# Altium PCB DS133-1.0-B电导率传感器.PcbDoc
Units mil, origin at the board's own origin, x right, y up, seen from the top; angles counter-clockwise.
Board outline 1614.17 x 2519.69 mil, 2 copper layers (Top Layer, Bottom Layer); 78 components, 67 nets, 269 pads, 114 vias.
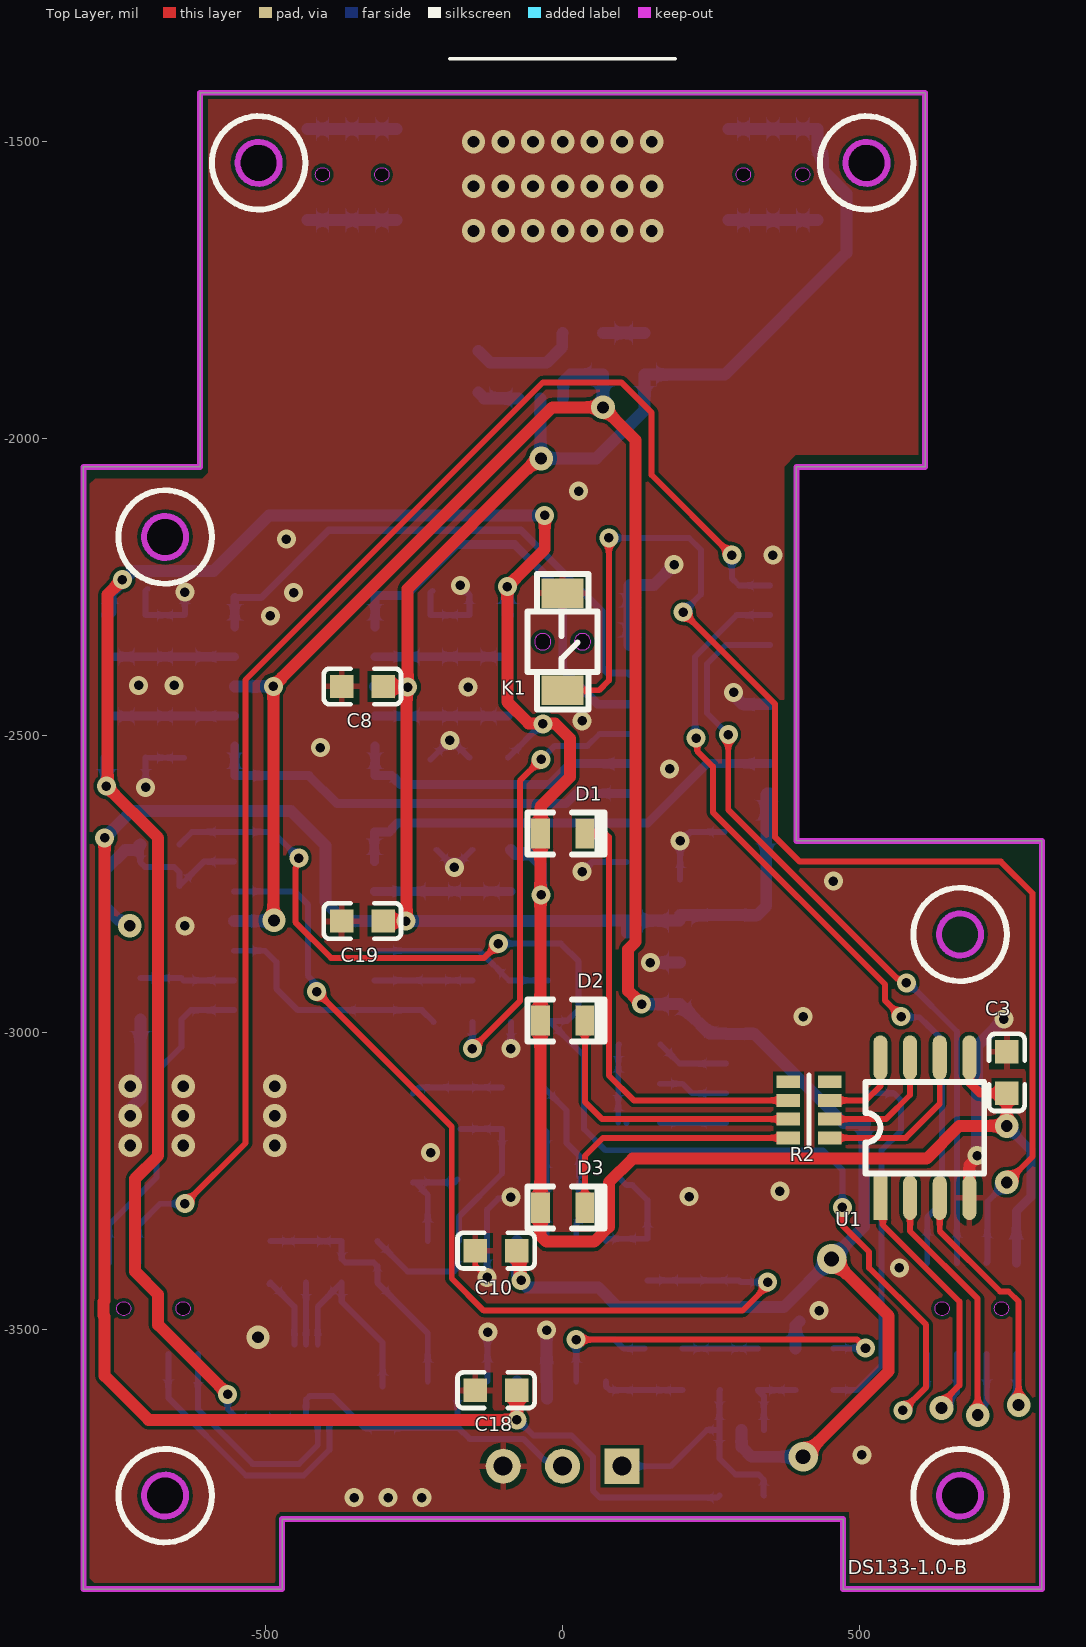
[diagram p0: Top Layer view]
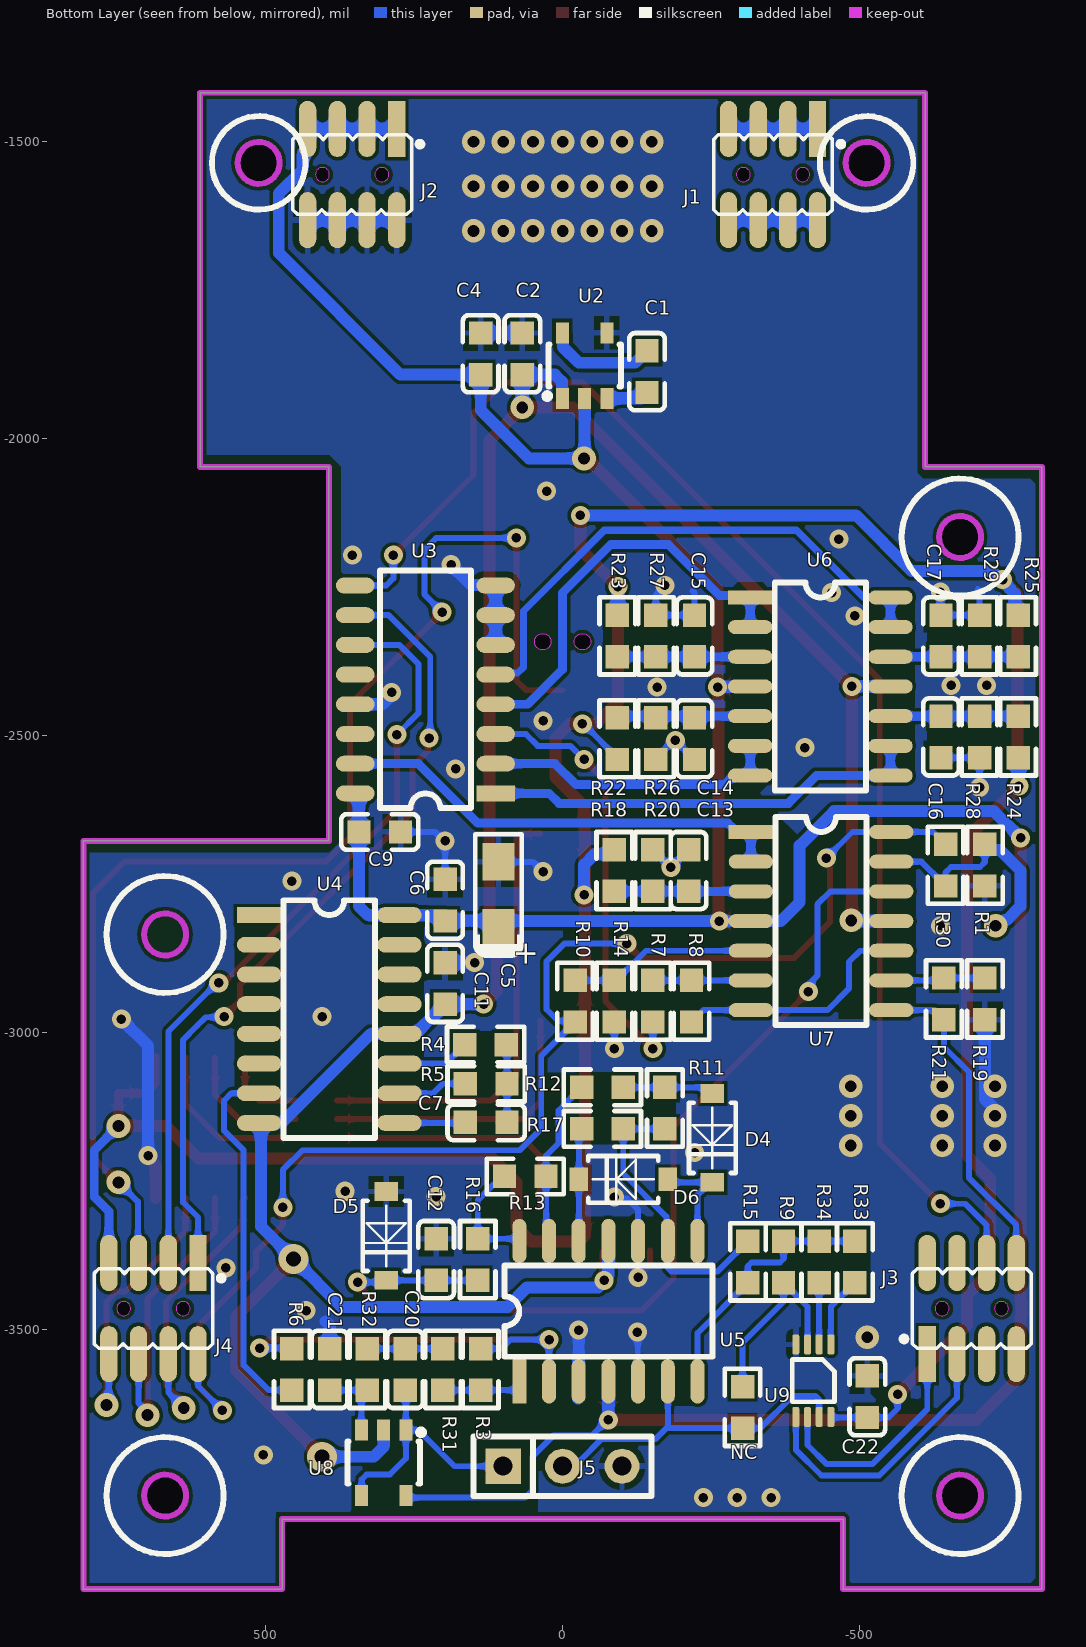
[diagram p1: Bottom Layer view, seen from below]
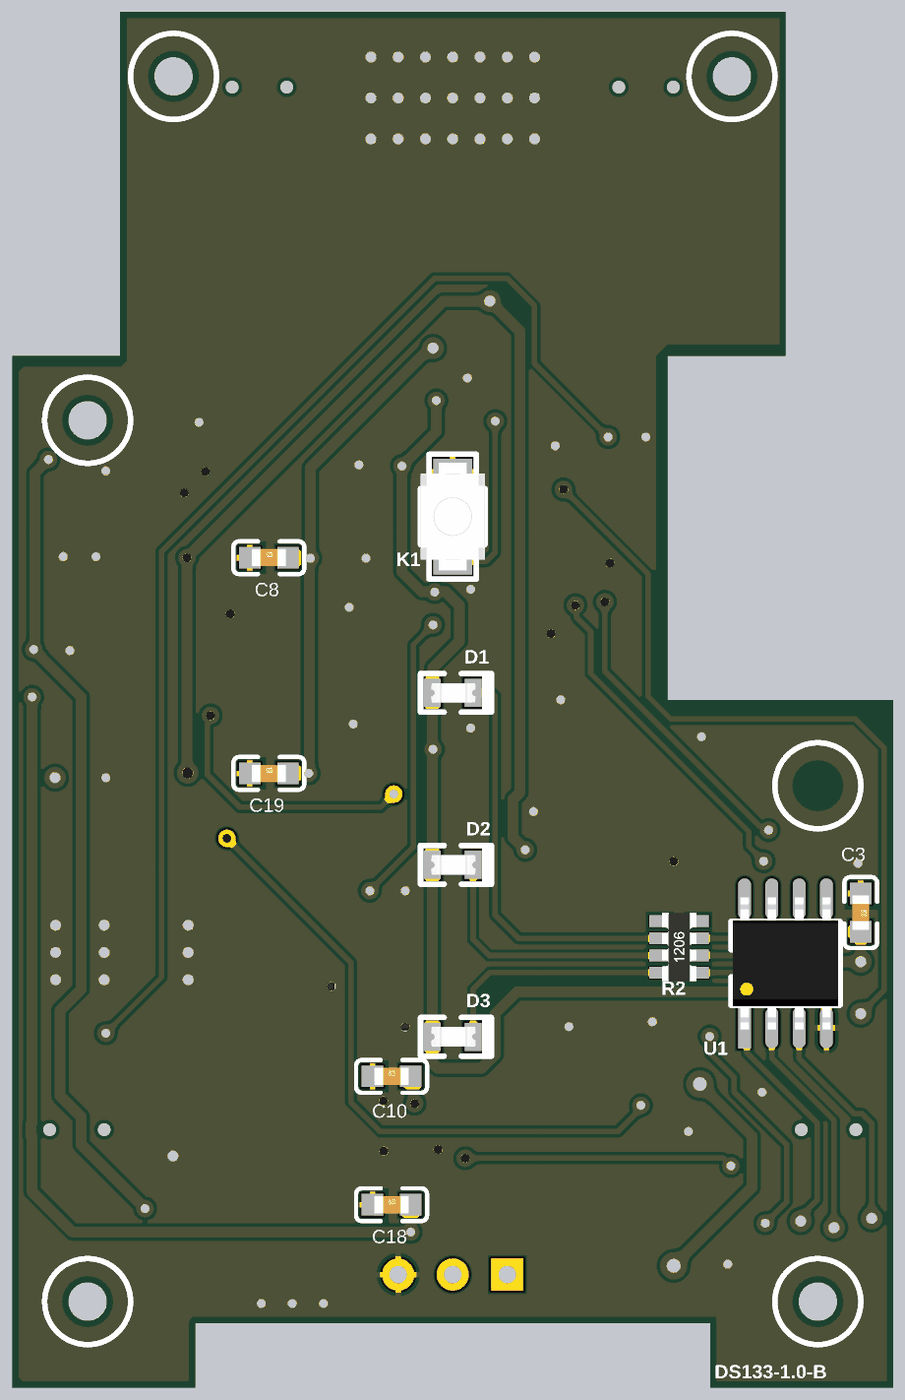
[diagram p2: 3D render of the assembled board from above, using the file's embedded part models]
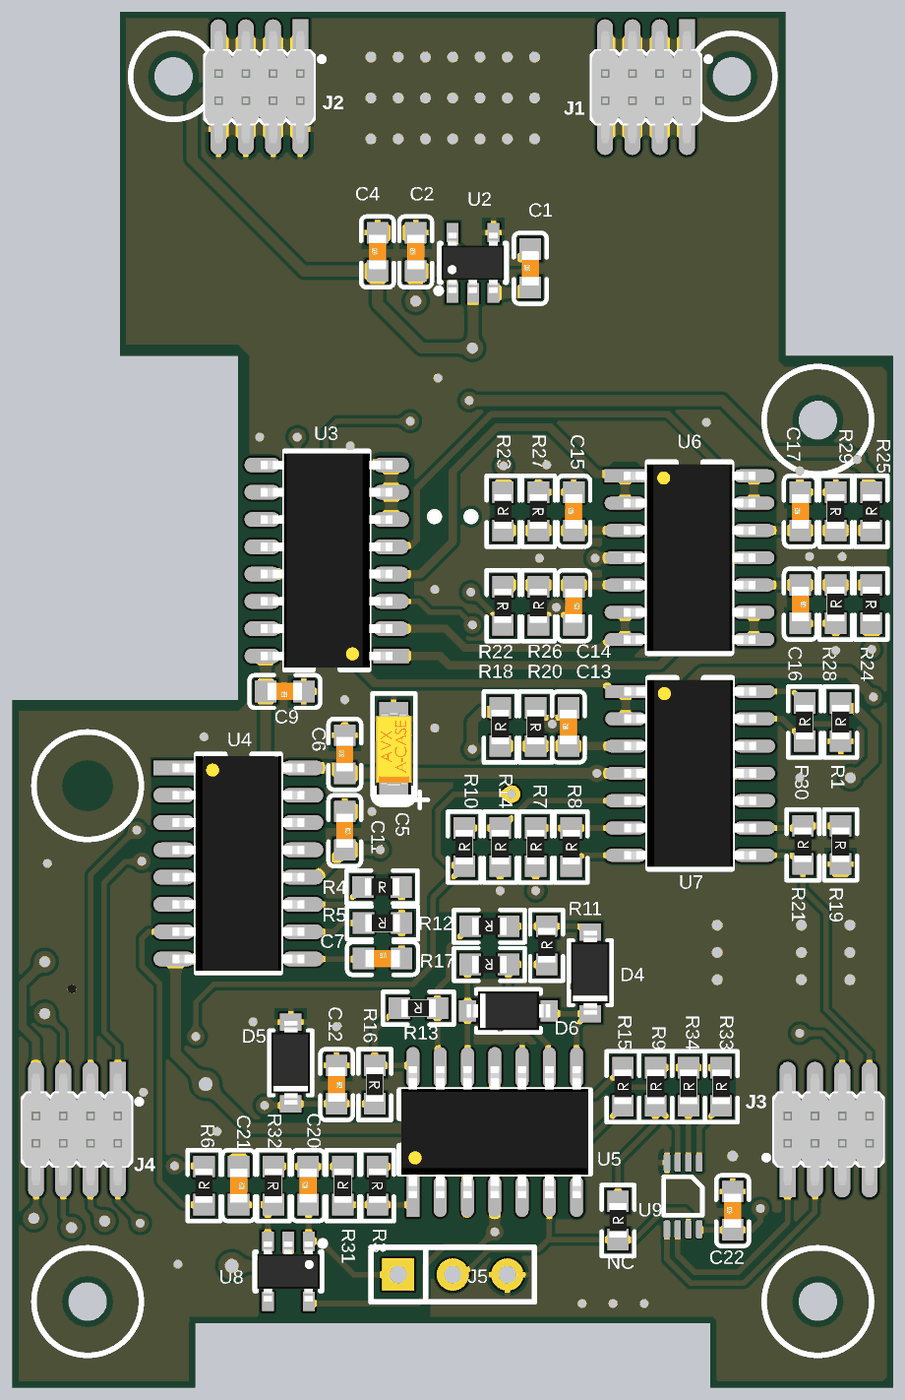
[diagram p3: 3D render of the assembled board from below, using the file's embedded part models]

## Layer stack, top to bottom
Top Solder: solder mask 0.4, Solder Resist, Dk 3.5
Top Layer: signal copper 1.4
Dielectric 1: dielectric 12.6, FR-4, Dk 4.8
Bottom Layer: signal copper 1.4
Bottom Solder: solder mask 0.4, Solder Resist, Dk 3.5

## Board outline
-807.09,-3937.01 -807.09,-2047.24 -610.24,-2047.24 -610.24,-1417.32 610.24,-1417.32 610.24,-2047.24 393.7,-2047.24 393.7,-2677.17 807.09,-2677.17 807.09,-3937.01 472.44,-3937.01 472.44,-3818.9 -472.44,-3818.9 -472.44,-3937.01
cut-out: 511.81,-1570.87 cw(c511.81,-1535.43) 476.38,-1535.43 cw(c511.81,-1535.43) 511.81,-1500 cw(c511.81,-1535.43) 547.24,-1535.43 cw(c511.81,-1535.43)
cut-out: -511.81,-1570.87 cw(c-511.81,-1535.43) -547.24,-1535.43 cw(c-511.81,-1535.43) -511.81,-1500 cw(c-511.81,-1535.43) -476.38,-1535.43 cw(c-511.81,-1535.43)
cut-out: -669.29,-2200.79 cw(c-669.29,-2165.35) -704.72,-2165.35 cw(c-669.29,-2165.35) -669.29,-2129.92 cw(c-669.29,-2165.35) -633.86,-2165.35 cw(c-669.29,-2165.35)
cut-out: -704.72,-3779.53 ccw(c-669.29,-3779.53) -669.29,-3814.96 ccw(c-669.29,-3779.53) -633.86,-3779.53 ccw(c-669.29,-3779.53) -669.29,-3744.09 ccw(c-669.29,-3779.53)
cut-out: 633.86,-3779.53 ccw(c669.29,-3779.53) 669.29,-3814.96 ccw(c669.29,-3779.53) 704.72,-3779.53 ccw(c669.29,-3779.53) 669.29,-3744.09 ccw(c669.29,-3779.53)

## Design rules (kind name [scope] priority, off if disabled: settings)
Clearance [All] p1: gap=6 ignorepadtopadclearanceinfootprint=TRUE
PolygonConnect [All] p1: thpad.connectstyle=Relief thpad.reliefconductorwidth=10 thpad.reliefentries=4 thpad.polygonreliefangle="90 Angle" thpad.airgapwidth=10 smdpad.connectstyle=Relief smdpad.reliefconductorwidth=10 smdpad.reliefentries=4 smdpad.polygonreliefangle="90 Angle" smdpad.airgapwidth=10 via.connectstyle=Direct via.reliefconductorwidth=10 via.reliefentries=4 via.polygonreliefangle="90 Angle" via.airgapwidth=10
RoutingVias [All] p1: holewidth=16 width=32 viastyle="Through Hole" minholewidth=16 minwidth=32 maxholewidth=28 maxwidth=50
SolderMaskExpansion [All] p1: expansion=4 istentingtop=FALSE
Width [All] p1: maxlimit=20 minlimit=10 preferedwidth=10
30 further rules are at their usual default settings.

## Classes and differential pairs
net class R33_Nets: NetR9_2 NetR33_1
net class NC_Nets: NetJ5_2 NetNC_2
net class U9_Nets: GND IN1 IN2 NetJ5_2 NetNC_2 NetR33_1 NetR34_1 VCC_3V3_MCU
net class R34_Nets: NetR9_2 NetR34_1
net class R9_Nets: NetNC_2 NetR9_2
net class C22_Nets: GND VCC_3V3_MCU
net class U8_Nets: NetC21_2 SIN VCC_5V VCC_-5V
net class R32_Nets: NetC20_2 NetC21_2
net class R31_Nets: NetC20_2 NetR3_2
net class C21_Nets: GND NetC21_2
net class C20_Nets: NetC20_2 SIN
net class R30_Nets: ADC1 NetR1_2
net class R1_Nets: GND NetR1_2
net class C19_Nets: GND VCC_5V
net class C18_Nets: GND VCC_5V
net class U6_Nets: NetC14_1 NetC15_1 NetC16_1 NetC17_1 VCC_5V VCC_-5V Vref_1V43 Vref_1V98 Vref_V3 Vref_V89
net class U7_Nets: ADC0 ADC1 NetC12_2 NetC13_1 NetR1_2 NetR7_2 NetR8_1 NetR10_2 NetR19_1 VCC_5V VCC_-5V Vref_2V53
net class U5_Nets: GND NetD4_2 NetD6_2 NetJ5_2 NetR3_1 NetR3_2 NetR9_2 NetR11_1 NetR12_2 NetR13_2 VCC_5V VCC_-5V
net class U4_Nets: NetC7_1 NetR4_1 NetR5_2 NetR6_1 NetU4_1 NetU4_2 NetU4_3 NetU4_4 NetU4_5 NetU4_6 NetU4_13 NetU4_14 NetU4_15 VCC_5V VCC_-5V
net class U3_Nets: DAC_OUT GND I2C1_SCL I2C1_SDA NetU3_2 NetU3_4 NetU3_6 NetU3_9 NetU3_10 NetU3_11 VCC_5V Vref Vref_1V43 Vref_1V98 Vref_2V53 Vref_V3 Vref_V89
net class U2_Nets: GND NetC1_1 NetC1_2 VCC_5V VCC_-5V
net class U1_Nets: Dis_blue_EN Dis_green_EN Dis_red_EN GND NetR2_1 NetR2_2 NetR2_3 VCC_3V3_MCU
net class R29_Nets: GND NetC17_1
net class R28_Nets: GND NetC16_1
net class R27_Nets: GND NetC15_1
net class R26_Nets: GND NetC14_1
net class R25_Nets: NetC17_1 VCC_3V3_MCU
net class R24_Nets: NetC16_1 VCC_3V3_MCU
net class R23_Nets: NetC15_1 VCC_3V3_MCU
net class R22_Nets: NetC14_1 VCC_3V3_MCU
net class R21_Nets: ADC0 NetR19_1
net class R20_Nets: GND NetC13_1
net class R19_Nets: GND NetR19_1
net class R18_Nets: NetC13_1 VCC_3V3_MCU
net class R17_Nets: NetD6_2 NetR11_1
net class R16_Nets: NetC12_2 NetR13_2
net class R15_Nets: NetR9_2 NetR11_1
net class R14_Nets: GND NetR10_2
net class R13_Nets: NetR12_2 NetR13_2
net class R12_Nets: NetD4_1 NetR12_2
net class R11_Nets: NetD4_1 NetR11_1
net class R10_Nets: ADC1 NetR10_2
net class R8_Nets: NetR7_2 NetR8_1
net class R7_Nets: NetR7_2 Vref
net class R6_Nets: NetR3_1 NetR6_1
net class R5_Nets: NetC7_2 NetR5_2
net class R4_Nets: NetC7_2 NetR4_1
net class R3_Nets: NetR3_1 NetR3_2
net class R2_Nets: LED_blue LED_green LED_red NetR2_1 NetR2_2 NetR2_3
net class K1_Nets: GND KEY_HOME
net class J5_Nets: GND NetJ5_2 SIN
net class J4_Nets: ADC1 Dis_blue_EN Dis_green_EN Dis_red_EN I2C1_SCL I2C1_SDA KEY_HOME VCC_3V3_MCU
net class J3_Nets: ADC0 DAC_OUT IN1 IN2 SPI2_CS SPI2_SCK USART2_RXD USART2_TXD
net class J2_Nets: GND VCC_5V
net class J1_Nets: VBUS VSS
net class D6_Nets: NetD4_2 NetD6_2
net class D5_Nets: GND NetC12_2
net class D4_Nets: NetD4_1 NetD4_2
net class D3_Nets: LED_green VCC_3V3_MCU
net class D2_Nets: LED_red VCC_3V3_MCU
net class D1_Nets: LED_blue VCC_3V3_MCU
net class C17_Nets: GND NetC17_1
net class C16_Nets: GND NetC16_1
net class C15_Nets: GND NetC15_1
net class C14_Nets: GND NetC14_1
net class C13_Nets: GND NetC13_1
net class C12_Nets: GND NetC12_2
net class C11_Nets: GND VCC_-5V
net class C10_Nets: GND VCC_-5V
net class C9_Nets: GND VCC_5V
net class C8_Nets: GND VCC_5V
net class C7_Nets: NetC7_1 NetC7_2
net class C6_Nets: GND VCC_5V
net class C5_Nets: GND VCC_5V
net class C4_Nets: GND VCC_5V
net class C3_Nets: GND VCC_3V3_MCU
net class C2_Nets: GND VCC_-5V
net class C1_Nets: NetC1_1 NetC1_2

## Components (designator, comment, footprint, x,y, rotation, side; value= is the part's Value field where it differs from the comment)
C1 "SMDCAP00016" 0603CAP -142.09,-1887.01 r90 bottom value=3.3uF
C2 "SMDCAP00016" 0603CAP 67.91,-1856.89 r90 bottom value=3.3uF
C3 "" 0603CAP 747.91,-3066.97 r270 top value=100nF
C4 "SMDCAP00016" 0603CAP 137.91,-1856.89 r90 bottom value=3.3uF
C5 "AVX_10uF/16V ±10％(C106)" AVX_3216-18(1206)_SMD 107.91,-2768.01 r90 bottom value=10uF
C6 "SMDCAP00013" 0603CAP 197.91,-2777.01 r90 bottom value=100nF
C7 "SMDCAP00002" 0603CAP 128.68,-3151.01 r180 bottom value=20pF
C8 "" 0603CAP -337.13,-2417.01 r0 top value=100nF
C9 "" 0603CAP 307.87,-2662.01 r0 bottom value=100nF
C10 "" 0603CAP -112.13,-3367.01 r0 top value=100nF
C11 "" 0603CAP 197.91,-2916.97 r270 bottom value=100nF
C12 "" 0603CAP 212.91,-3382.01 r270 bottom value=100nF
C13 "" 0603CAP -212.09,-2727.01 r90 bottom value=100nF
C14 "" 0603CAP -222.09,-2505.01 r270 bottom value=100nF
C15 "" 0603CAP -222.09,-2332.01 r90 bottom value=100nF
C16 "" 0603CAP -637.09,-2502.01 r270 bottom value=100nF
C17 "" 0603CAP -637.09,-2332.01 r90 bottom value=100nF
C18 "" 0603CAP -112.13,-3602.01 r0 top value=100nF
C19 "" 0603CAP -337.13,-2812.01 r0 top value=100nF
C20 "MLCC 2.2nF 50V ±1％ 0603" 0603CAP 265.15,-3567.01 r90 bottom value=2.2nF±1%
C21 "MLCC 2.2nF 50V ±1％ 0603" 0603CAP 392.38,-3567.01 r270 bottom value=2.2nF±1%
C22 "" 0603CAP -513,-3613 r90 bottom value=100nF
D1 "SMDLED00010" LED_0805 0,-2664.57 r0 top locked value=BLUE
D2 "SMDLED00003" LED_0805 0,-2979.53 r0 top locked value=RED
D3 "Chip 翠绿LED 0805" LED_0805 0,-3294.49 r0 top locked value=GREEN
D4 "BAT54W" SOD-123 -252.09,-3177.2 r270 bottom
D5 "BAT54W" SOD-123 297,-3342.2 r270 bottom
D6 "BAT54W" SOD-123 -102.09,-3247.01 r0 bottom
J1 "X1321WVS-2x04J-C40D53" X1321WVS-2X04J-C40D53 -354.33,-1555.12 r0 bottom locked value=2*4P
J2 "X1321WVS-2x04J-C40D53" X1321WVS-2X04J-C40D53 354.33,-1555.12 r0 bottom locked value=2*4P
J3 "X1321WVS-2x04J-C40D53" X1321WVS-2X04J-C40D53 -688.98,-3464.57 r180 bottom locked value=2*4P
J4 "X1321WVS-2x04J-C40D53" X1321WVS-2X04J-C40D53 688.98,-3464.57 r0 bottom locked value=2*4P
J5 "SL000000042" SIP3 100,-3730 r180 bottom value=电导率探头
K1 "TS-1185-B-A-A-A" KEY_TS-1185-x-A-A-A 0,-2341.73 r270 top locked
NC "Chip 0R 1/16W ±1％ 0603" 0603RES -303,-3631 r90 bottom value=0R
R1 "Chip 10K 1/10W ±0.1％ 0603" 0603RES -711,-2718 r90 bottom value="10K ±0.1%"
R2 "SMDRES05003" 0603RES_Pack4 415,-3129.8 r180 top locked value=510R
R3 "Chip 2K 1/10W ±0.1％ 0603" 0603RES 137.91,-3567.01 r270 bottom value="2K ±0.1%"
R4 "Chip 100K 1/10W ±0.1％ 0603" 0603RES 129.73,-3020 r180 bottom value="100K ±0.1%"
R5 "Chip 10K 1/10W ±0.1％ 0603" 0603RES 128.68,-3086.01 r0 bottom value="10K ±0.1%"
R6 "Chip 20K 1/10W ±0.1％ 0603" 0603RES 456,-3567.01 r90 bottom value="20K ±0.1%"
R7 "SMDRES00071" 0603RES -152.09,-2947.01 r90 bottom value=100K
R8 "SMDRES00071" 0603RES -217.09,-2947.01 r90 bottom value=100K
R9 "Chip 820R 1/10W ±0.1％ 0603" 0603RES -372,-3386 r90 bottom value="820R ±0.1%"
R10 "SMDRES00071" 0603RES -21.02,-2947.01 r90 bottom value=100K
R11 "SMDRES00047" 0603RES -172.09,-3127.01 r90 bottom value=4.7K
R12 "SMDRES00047" 0603RES -67.09,-3092.01 r0 bottom value=4.7K
R13 "SMDRES00047" 0603RES 62.91,-3242.01 r0 bottom value=4.7K
R14 "SMDRES00071" 0603RES -87.09,-2947.01 r90 bottom value=100K
R15 "SMDRES00047" 0603RES -312,-3386 r90 bottom value=4.7K
R16 "Chip 10K 1/16W ±1％ 0603" 0603RES 142.91,-3382.01 r270 bottom value=10K
R17 "SMDRES00047" 0603RES -67.09,-3162.01 r0 bottom value=4.7K
R18 "Chip 300R 1/10W ±0.1％ 0603" 0603RES -87.09,-2726.97 r90 bottom value="300R ±0.1%"
R19 "Chip 5K 1/10W ±0.1％ 0603" 0603RES -711,-2943 r270 bottom value="5K ±0.1%"
R20 "Chip 1K 1/10W ±0.1％ 0603" 0603RES -152.09,-2726.97 r270 bottom value="1K ±0.1%"
R21 "Chip 20K 1/10W ±0.1％ 0603" 0603RES -642,-2943 r90 bottom value="20K ±0.1%"
R22 "Chip 2.7K 1/10W ±0.1％ 0603" 0603RES -92.09,-2505.01 r270 bottom value="2.7K ±0.1%"
R23 "Chip 10K 1/10W ±0.1％ 0603" 0603RES -92.09,-2332.01 r90 bottom value="10K ±0.1%"
R24 "Chip 1.3K 1/10W ±0.1％ 0603" 0603RES -767.09,-2502.01 r270 bottom value="1.3K ±0.1%"
R25 "Chip 665R 1/10W ±0.1％ 0603" 0603RES -767.09,-2332.01 r90 bottom value="665R ±0.1%"
R26 "Chip 1K 1/10W ±0.1％ 0603" 0603RES -157.09,-2505.01 r90 bottom value="1K ±0.1%"
R27 "Chip 1K 1/10W ±0.1％ 0603" 0603RES -157.09,-2332.01 r270 bottom value="1K ±0.1%"
R28 "Chip 1K 1/10W ±0.1％ 0603" 0603RES -702.09,-2502.01 r90 bottom value="1K ±0.1%"
R29 "Chip 1K 1/10W ±0.1％ 0603" 0603RES -702.09,-2332.01 r270 bottom value="1K ±0.1%"
R30 "Chip 10K 1/10W ±0.1％ 0603" 0603RES -645,-2718 r90 bottom value="10K ±0.1%"
R31 "Chip 2.7K 1/10W ±0.1％ 0603" 0603RES 201.53,-3567.01 r90 bottom value="2.7K ±0.1%"
R32 "Chip 2.7K 1/10W ±0.1％ 0603" 0603RES 328.77,-3567.01 r270 bottom value="2.7K ±0.1%"
R33 "SMDRES00096" 0603RES -492,-3386 r90 bottom value="82K ±0.1%"
R34 "Chip 8.2k 1/10W ±0.1％ 0603" 0603RES -432.31,-3386 r90 bottom value="8.2K ±0.1%"
U1 "SMDIC000018" SO-8 610,-3160 r90 top locked value=ULN2001
U2 "SGM3206" SOT23-5 -37.09,-1876.89 r180 bottom value=丝印SL7NL
U3 "XL14051BDR" SO-16#1 112.91,-2597.01 r0 bottom
U4 "CD4060BM" SO-16#2 511.02,-2802.01 r180 bottom
U5 "TL074" SO-14 72.91,-3587.01 r90 bottom
U6 "TL074" SO-14 -315.87,-2267.01 r180 bottom
U7 "TL074" SO-14 -317.09,-2662.01 r180 bottom
U8 "OPA192IDBVR / SOT-23-5" SOT23-5 301.4,-3724.12 r0 bottom
U9 "TS5A3359DCUR" VSSOP-8 -422.16,-3586.02 r270 bottom

## Footprints (in the part's own frame and the unit in brackets; to place one, negate y for a bottom-side part, rotate by r counter-clockwise, add the part's x,y. Pads: shape width x height; smd on the part's side, far side on the other; paste and mask are expansions set on the pad)
0603CAP [mm]
  rect 1x1 smd: 1(-0.889,0) 2(0.89,0)
  silkscreen extent -1.65,-0.76 1.65,0.76, body extent -0.8,-0.4 0.8,0.4, height 0.3
0603RES [mm]
  rect 1x1 smd: 1(-0.889,0) 2(0.889,0)
  silkscreen extent -1.65,-0.76 1.65,0.76, body extent -0.8,-0.41 0.8,0.41, height 0.51
0603RES_Pack4 [mm]
  rect 1x0.55 smd mask+0.05: 1(-0.889,1.2) 2(-0.889,0.4) 3(-0.889,-0.4) 4(-0.889,-1.2) 5(0.889,-1.2) 6(0.889,-0.4) 7(0.889,0.4) 8(0.889,1.2)
  silkscreen extent 0,-1.5 0,1.5, body extent -0.8,-1.6 0.8,1.6, height 0.5
AVX_3216-18(1206)_SMD [mm]
  rect 1.6x1.35 smd: 1(-1.41,0) 2(1.41,0)
  silkscreen extent -2.6,-1 2.6,1, body extent -1.7,-0.84 1.7,0.84, height 1.71
KEY_TS-1185-x-A-A-A [mm]
  rect 1.25x1.8 smd: 1(-2.075,0) 2(2.075,0)
  Keep-Out Layer board cut-out: 0.35,-0.85 0.323,-0.716 0.247,-0.603 0.134,-0.527 0,-0.5 0,-0.5 -0.134,-0.527 -0.247,-0.603 -0.323,-0.716 -0.35,-0.85 -0.35,-0.85 -0.323,-0.984 -0.247,-1.097 -0.134,-1.173 0,-1.2 0,-1.2 0.134,-1.173 0.247,-1.097 0.323,-0.984 0.35,-0.85
  Keep-Out Layer board cut-out: -0.35,0.85 -0.323,0.716 -0.247,0.603 -0.134,0.527 0,0.5 0,0.5 0.134,0.527 0.247,0.603 0.323,0.716 0.35,0.85 0.35,0.85 0.323,0.984 0.247,1.097 0.134,1.173 0,1.2 0,1.2 -0.134,1.173 -0.247,1.097 -0.323,0.984 -0.35,0.85
  silkscreen extent -2.9,-1.5 2.9,1.5, body extent -2.5,-1.5 2.5,1.5, height 2
LED_0805 [mm]
  rect 0.8x1.3 smd: 1(-0.95,0) 2(0.95,0)
  silkscreen extent -1.5,-0.9 1.8,0.9, body extent -1,-0.45 1.06,0.45, height 0.85
SIP3 [mm]
  rect 1.5x1.5 hole 0.813: 1(0,0)
  round 1.5 hole 0.813: 2(2.54,0) 3(5.08,0)
  silkscreen extent -1.27,-1.27 6.35,1.27
SO-8 [mm]
  rect 1.9x0.6 smd: 1(-3,1.905)
  oval 1.9x0.6 smd: 2(-3,0.635) 3(-3,-0.635) 4(-3,-1.905) 5(3,-1.905) 6(3,-0.635) 7(3,0.635) 8(3,1.905)
  silkscreen extent -1.95,-2.54 1.95,2.54, body extent -3.07,-2.44 3.07,2.44, height 1.77
SO-14 [mm]
  rect 1.9x0.6 smd: 1(0,0)
  oval 1.9x0.6 smd: 2(0,-1.27) 3(0,-2.54) 4(0,-3.81) 5(0,-5.08) 6(0,-6.35) 7(0,-7.62) 8(6,-7.62) 9(6,-6.35) 10(6,-5.08) 11(6,-3.81) 12(6,-2.54) 13(6,-1.27) 14(6,0)
  silkscreen extent 1.05,-8.25 4.95,0.63, body extent -0.07,-8.16 6.07,0.54, height 1.77
SO-16#1 [mm]
  rect 1.651x0.68 smd: 1(0,0)
  oval 1.651x0.68 smd: 2(0,-1.27) 3(0,-2.54) 4(0,-3.81) 5(0,-5.08) 6(0,-6.35) 7(0,-7.62) 8(0,-8.89) 9(6,-8.89) 10(6,-7.62) 11(6,-6.35) 12(6,-5.08) 13(6,-3.81) 14(6,-2.54) 15(6,-1.27) 16(6,0)
  silkscreen extent 1.05,-9.53 4.95,0.64, body extent -0.07,-9.43 6.07,0.54, height 1.77
SO-16#2 [mm]
  rect 1.9x0.68 smd: 1(0,0)
  oval 1.9x0.68 smd: 2(0,-1.27) 3(0,-2.54) 4(0,-3.81) 5(0,-5.08) 6(0,-6.35) 7(0,-7.62) 8(0,-8.89) 9(6,-8.89) 10(6,-7.62) 11(6,-6.35) 12(6,-5.08) 13(6,-3.81) 14(6,-2.54) 15(6,-1.27) 16(6,0)
  silkscreen extent 1.05,-9.53 4.95,0.63, body extent -0.07,-9.43 6.07,0.54, height 1.77
SOD-123 [mm]
  rect 0.8x1 smd: 1(-1.9,0) 2(1.9,0)
  silkscreen extent -1.5,-1 1.5,1, body extent -1.95,-0.9 1.95,0.9, height 1.18
SOT23-5 [mm] "SOT-23/SC-74A; 5 Leads; Body 3.1 x 3 mm, inc. leads (LxW max)"
  rect 0.55x0.9 smd: 1(-0.95,-1.4) 2(0,-1.4) 3(0.95,-1.4) 4(0.95,1.4) 5(-0.95,1.4)
  silkscreen extent -1.7,-1.4 1.55,0.9, body extent -1.45,-1.4 1.45,1.4, height 1.45
VSSOP-8 [mm]
  rrect50% 0.85x0.3 smd mask+0.05: 1(-1.55,0.75) 2(-1.55,0.25) 3(-1.55,-0.25) 4(-1.55,-0.75) 5(1.55,-0.75) 6(1.55,-0.25) 7(1.55,0.25) 8(1.55,0.75)
  silkscreen extent -0.9,-0.9 0.9,0.9
X1321WVS-2X04J-C40D53 [mm]
  rect 0.74x2.4 smd: 1(-1.905,-1.95)
  oval 0.74x2.4 smd: 2(-1.905,1.95) 3(-0.635,-1.95) 4(-0.635,1.95) 5(0.635,-1.95) 6(0.635,1.95) 7(1.905,-1.95) 8(1.905,1.95)
  Keep-Out Layer board cut-out: -1.57,0 -1.547,-0.115 -1.482,-0.212 -1.385,-0.277 -1.27,-0.3 -1.27,-0.3 -1.155,-0.277 -1.058,-0.212 -0.993,-0.115 -0.97,0 -0.97,0 -0.993,0.115 -1.058,0.212 -1.155,0.277 -1.27,0.3 -1.27,0.3 -1.385,0.277 -1.482,0.212 -1.547,0.115 -1.57,0
  Keep-Out Layer board cut-out: 1.57,0 1.547,0.115 1.482,0.212 1.385,0.277 1.27,0.3 1.27,0.3 1.155,0.277 1.058,0.212 0.993,0.115 0.97,0 0.97,0 0.993,-0.115 1.058,-0.212 1.155,-0.277 1.27,-0.3 1.27,-0.3 1.385,-0.277 1.482,-0.212 1.547,-0.115 1.57,0
  silkscreen extent -3,-1.7 2.54,1.7, body extent -2.54,-2.6 2.54,2.6, height 5.5

## Part data
C1 C2 C4: library part "MLCC 10uF 50V ±10％ 0603", "贴片电容"
C3 C6 C8 C9 C10 C11 C12 C13 C14 C15 C16 C17 C18 C19 C22: library part "MLCC 100nF 50V ±10％ 0603", "贴片电容"
C5: "钽电容"
C7: library part "MLCC 20pF 50V ±10％ 0603", "贴片电容"
C20 C21: "贴片电容"
D1: library part "Chip 蓝色LED 0805", "贴片LED"
D2: library part "Chip 红色LED 0805", "贴片LED"
D3: "贴片LED"
J1 J2 J3 J4: "双排针2x4P 立贴 1.27mm"
J5: library part "DIP3 单排直针 间距2.54mm 针长11mm 铜", "单排直针"
K1: "轻触开关"
NC R16: "贴片电阻"
R2: library part "Chip R*4 510R 1/16W ±5％ 0603", "贴片排阻"
R7 R8 R10 R14: library part "Chip 100K 1/16W ±1％ 0603", "贴片电阻"
R11 R12 R13 R15 R17: library part "Chip 4.7K 1/10W ±1％ 0603", "贴片电阻"
R33: library part "Chip 82K 1/10W ±0.1％ 0603"
U1: library part "ULN2001 SOP-8", "电机驱动芯片"
U2: "电荷泵芯片"
U3: "XINLUDA(信路达) / XL14051BDR / SOP-16​"
U4: "HGSEMI(华冠) / CD4060BM/TR / SOP-16"
U5 U6 U7: "TI / TL074CDR / SOIC-14"
U8: library part AD8605, "低失调电压: 65 µV（最大值） / 低输入偏置电流: 1 pA（最大值） / 单电源供电：2.7 V至5.5 V"
U9: "单刀三掷(SP3T)模拟开关"

## Via types
v1: diameter 32, hole 16, Top Layer to Bottom Layer, tented both sides, 70 vias
v2: diameter 39.37, hole 19.68, Top Layer to Bottom Layer, tented both sides, 33 vias
v3: diameter 40, hole 20, Top Layer to Bottom Layer, tented both sides, 7 vias
v4: diameter 50, hole 25, Top Layer to Bottom Layer, tented both sides, 2 vias
v5: diameter 32, hole 16, Top Layer to Bottom Layer, 2 vias

## Nets (pads, with @x,y where several pads share a name; then routed paths per layer and width w, separated by ;. In a path a pad name is that pad's centre, name@x,y a point inside that pad or via, vN(x,y) a via of type N, cw(c..) or ccw(c..) an arc to the next point about the centre after c; other vN are vias at no path point)
ADC0: J3.8 R21.1 U7.8 | length 555.6
  Bottom Layer w10: J3.8 -763.68,-3387.5 -763.68,-3323.6 -684.09,-3244.01 -684.09,-3066 -642.09,-3024 R21.1@-642.09,-2978 ; R21.1 -626.01,-2962.01 U7.8
ADC1: J4.2 R10.1 R30.2 U7.14 | length 2258.7
  Top Layer w10: v1(-444,-2706) -448.21,-2710.21 -448.21,-2721.07 -450,-2722.86 -450,-2814 -390,-2874 -132,-2874 v5(-108,-2850) ; v1(471,-3294) 471,-3324.09 516,-3369.09 516,-3396 612,-3492 612,-3597 v1(573,-3636)
  Bottom Layer w10: R30.2 -624.01,-2662.01 U7.14 -487.99,-2662.01 v1(-444,-2706) ; v5(-108,-2850) -3,-2850 27,-2880 27,-2960.99 7.8,-2980.19 -19.2,-2980.19 R10.1 36,-3039.03 36,-3162 72,-3198 438,-3198 471,-3231 v1(471,-3294) ; v1(573,-3636) 613.98,-3595.02 J4.2
DAC_OUT: J3.6 U3.9 | length 2397.6
  Top Layer w10: v1(-636,-3288) -534,-3186 -534,-2406 -33,-1905 99,-1905 150,-1956 150,-2061 v1(285,-2196)
  Bottom Layer w10: J3.6 -713.98,-3323.98 -678,-3288 v1(-636,-3288) ; v1(285,-2196) 285,-2235 297.01,-2247.01 U3.9
Dis_blue_EN: J4.4 U1.1 | length 522.8
  Top Layer w10: U1.1 539.35,-3282.46 539.35,-3324.19 667.91,-3452.76 667.91,-3593.89 637.91,-3623.89 v3(637.91,-3632.01)
  Bottom Layer w10: v3(637.91,-3632.01) 663.98,-3605.94 J4.4
Dis_green_EN: J4.8 U1.3 | length 499.6
  Top Layer w10: U1.3 635,-3334.09 736.66,-3435.76 750.91,-3435.76 767.79,-3452.63 767.79,-3466.88 767.91,-3467.01 v3(767.91,-3627.01)
  Bottom Layer w10: J4.8 763.98,-3623.07 v3(767.91,-3627.01)
Dis_red_EN: J4.6 U1.2 | length 522
  Top Layer w10: U1.2 585,-3334.09 698.91,-3448.01 v3(698.91,-3644.01)
  Bottom Layer w10: v3(698.91,-3644.01) 698.91,-3638.21 713.98,-3623.15 J4.6
GND: C2.2 C3.1 C4.2 C5.2 C6.2 C8.1 C9.1 C10.1 C11.1 C12.1 C13.2 C14.2 C15.2 C16.2 C17.2 C18.1 C19.1 C21.1 C22.2 D5.1 J2.2 J2.4 J2.6 J2.8 J5.3 K1.1 R1.1 R14.1 R19.2 R20.1 R26.1 R27.1 R28.1 R29.1 U1.4 U2.4 U3.6 U3.7 U3.8 U3.13 U5.3 U5.5 U5.10 U9.4 | length 2355
  Top Layer w10: C10.1 -147.13,-3391.97 v1(-127.09,-3412.01)
  Top Layer w20: U1.4 685,-3223.17 697.91,-3210.26 v1(697.91,-3207.01)
  Bottom Layer w10: v1(-702.09,-2587.01) R28.1 R28.1 C16.2 ; -699,-2253 -702.09,-2256.09 R29.1 R29.1 C17.2 -636.09,-2295.97 v1(-636.09,-2258.01) ; C14.2 -189.97,-2507.93 v1(-189.97,-2507.84) ; -219,-2256 -222.09,-2259.09 C15.2 R27.1 R27.1 -157.09,-2263.03 -172.09,-2248.03 v1(-172.09,-2247.01) ; C13.2 v1(-182.4,-2721.65) -181.77,-2721.65 R20.1 ; v1@-187.09,-2507.01 R26.1@-157.09,-2537.01 ; U5.5 -126.54,-3586.46 -126.54,-3504.54 v1(-126,-3504) ; v1(-127.09,-3412.01) U5.10 -127.09,-3298.09 -108.47,-3279.47 -89.55,-3279.47 v1(-87.09,-3277.01) ; v1(-87.09,-3027.01) R14.1 ; v1(32.91,-2729.01) 33.26,-2729.01 49.77,-2712.5 C5.2 ; C6.2 v1(197.91,-2677.01) 199.77,-2677.01 214.77,-2662.01 C9.1
  Bottom Layer w20: v2@-726.09,-3132.01 -726.09,-3126.77 -711,-3111.68 R19.2 ; v1(-27,-3501) -27.09,-3501.09 U5.3 -26.39,-3587.7 -26.39,-3615.85 U5.3@-25.9,-3616.34 ; C2.2 C4.2 ; U3.6 U3.7 U3.8 113.61,-2246.31 153.61,-2246.31 v1(187.91,-2212.01) ; v1(147.95,-2881.97) v1(147.95,-2881.97) C11.1 ; J2.2 J2.4 J2.6 J2.8 ; v1(287.91,-2427.01) 287.91,-2430.26 293.91,-2436.26 293.91,-2438.01 302.91,-2447.01 U3.13 ; C21.1 392.38,-3492.62 399,-3486 ; v1(697.91,-3207.01) 697.91,-3022.01 v1(742.91,-2977.01)
  other v1: -351,-3783 -294,-3783 -237,-3783 504,-3711 432,-3468 567,-3396 213,-3276 366,-3267 -222.09,-3202.01 405,-2973 -636,-2820 456,-2745 180,-2556 -408,-2520 33,-2475 -159,-2418 -714,-2415 -654,-2415 -492,-2298 -453,-2259 354,-2196 -465,-2169 27,-2088
  other v2: -513,-3513 -728,-3190 -639,-3190 -484.91,-3190 -728,-3140 -639,-3140 -484.91,-3140 -728,-3090 -639,-3090 -484.91,-3090 -150,-1650 -100,-1650 -50,-1650 0,-1650 50,-1650 100,-1650 150,-1650 -150,-1575 -100,-1575 -50,-1575 0,-1575 50,-1575 100,-1575 150,-1575 -150,-1500 -100,-1500 -50,-1500 0,-1500 50,-1500 100,-1500 150,-1500
I2C1_SCL: J4.1 U3.10 | length 1376.3
  Top Layer w10: v1(224.91,-2504.01) 226.83,-2505.93 226.83,-2525.93 252.91,-2552.01 252.91,-2628.91 543,-2919 543,-2946 v1(570,-2973)
  Bottom Layer w10: v1(224.91,-2504.01) 222.91,-2502.01 222.91,-2367.01 292.91,-2297.01 U3.10 ; v1(570,-2973) 571,-2974 601,-2974 615.56,-2988.56 639,-3012 639,-3285.92 613.98,-3310.94 J4.1
I2C1_SDA: J4.3 U3.11 | length 1309.6
  Top Layer w10: v1(278.91,-2498.01) 278.91,-2624.91 562.58,-2908.58 565.63,-2908.58 573.05,-2916 v1(579,-2916)
  Bottom Layer w10: v1(278.91,-2498.01) 243,-2462.09 243,-2379 274.99,-2347.01 U3.11 ; v1(579,-2916) 582,-2916 663.98,-2997.98 J4.3
IN1: J3.1 U9.6 | length 392.8
  Bottom Layer w10: J3.1 -613.98,-3634.02 -522,-3726 -444,-3726 -412.32,-3694.31 U9.6
IN2: J3.3 U9.5 | length 472.4
  Bottom Layer w10: J3.3 -663.98,-3614.86 -533.15,-3745.68 -435.85,-3745.68 -392.63,-3702.47 U9.5
KEY_HOME: J4.5 K1.2 | length 2175.3
  Top Layer w10: K1.2 61.5,-2423.43 77.91,-2407.01 v1(77.91,-2167.01) ; v1(202.91,-2292.01) 357.91,-2447.01 357.91,-2670.91 399.01,-2712.01 737.91,-2712.01 791.09,-2765.18 791.09,-3208.83 v3(747.91,-3252.01)
  Bottom Layer w10: v1(77.91,-2167.01) 212.91,-2167.01 232.91,-2187.01 232.91,-2262.01 v1(202.91,-2292.01) ; J4.5 715.3,-3386.47 715.3,-3284.62 v3(747.91,-3252.01)
LED_blue: D1.2 R2.6 | length 763.8
  Top Layer w10: D1.2 37.78,-2664.94 72.06,-2664.94 77.91,-2670.8 77.91,-3072.01 119.96,-3114.06 R2.6
LED_green: D3.2 R2.8 | length 442.2
  Top Layer w10: D3.2 37.4,-3207.52 67.87,-3177.05 R2.8
LED_red: D2.2 R2.7 | length 491.6
  Top Layer w10: D2.2 37.4,-3116.5 66.46,-3145.55 R2.7
NetC1_1: C1.1 U2.3 | length 71.7
  Bottom Layer w20: C1.1 -132.09,-1932.01 U2.3
NetC1_2: C1.2 U2.5 | length 184.9
  Bottom Layer w20: C1.2 -122.05,-1872.01 -27.09,-1872.01 -0.51,-1845.43 -0.51,-1822.6 U2.5
NetC7_1: C7.1 U4.9 | length 111.5
  Bottom Layer w10: C7.1 164.68,-3152.01 U4.9
NetC7_2: C7.2 R4.2 R5.1 | length 131.5
  Bottom Layer w10: C7.2 93.65,-3021.09 R4.2 ; C7.2@107.91,-3152.01 C7.2@107.95,-3151.97
NetC12_2: C12.2 D5.2 R16.2 U7.12 | length 1644.5
  Top Layer w10: v5(-414,-2931) -186.64,-3158.36 -186.64,-3413.99 -132.63,-3468 303,-3468 345,-3426 v1(345,-3420)
  Bottom Layer w10: U7.12 -450.99,-2762.01 -429,-2784 -429,-2904 -414,-2919 v5(-414,-2931) ; R16.2 D5.2 300,-3420 v1(345,-3420)
NetC13_1: C13.1 R18.1 R20.2 U7.3 | length 230
  Bottom Layer w15: U7.3 U7.3 R20.2 R18.1
NetC14_1: C14.1 R22.1 R26.2 U6.5 | length 223.8
  Bottom Layer w15: U6.5 -222.09,-2467.01 -157.09,-2467.01 R22.1@-92.09,-2467.01
NetC15_1: C15.1 R23.1 R27.2 U6.3 | length 223.8
  Bottom Layer w15: U6.3 C15.1 R27.2 R23.1
NetC16_1: C16.1 R24.1 R28.2 U6.10 | length 215
  Bottom Layer w15: R24.1 R28.2 C16.1 U6.10
NetC17_1: C17.1 R25.1 R29.2 U6.12 | length 215
  Bottom Layer w15: R25.1 R29.2 C17.1 U6.12
NetC20_2: C20.2 R31.2 R32.1 | length 127.2
  Bottom Layer w10: R31.2 R32.1
NetC21_2: C21.2 R32.2 U8.3 | length 134.8
  Bottom Layer w10: U8.3 338.8,-3612.05 R32.2 392.34,-3602.01 C21.2
NetD4_1: D4.1 R11.2 R12.1 | length 154.3
  Bottom Layer w10: D4.1 -241.69,-3092.01 R11.2 R12.1
NetD4_2: D4.2 D6.1 U5.8 | length 184.8
  Bottom Layer w10: D4.2 D4.2@-248.15,-3252.01 ; U5.8 -227.09,-3273.07 D4.2@-248.15,-3252.01 ; D6.1 -181.89,-3252.01 D4.2@-248.15,-3252.01
NetD6_2: D6.2 R17.2 U5.12 | length 190.9
  Bottom Layer w10: R17.2 -27.28,-3166.81 D6.2 -27.28,-3350.59 U5.12
NetJ5_2: J5.2 NC.1 U5.6 U9.7 | length 589
  Bottom Layer w10: U9.7 -432,-3617.86 -426.14,-3612 -387,-3612 -333,-3666 NC.1 -174.61,-3666 -156.61,-3684 -66,-3684 -29.39,-3720.61 -9.39,-3720.61 J5.2 ; -177.09,-3663.53 U5.6
NetNC_2: NC.2 R9.1 U9.3 | length 324.3
  Bottom Layer w10: U9.3 -412.32,-3461.31 R9.1 -372,-3453 -303,-3522 NC.2
NetR1_2: R1.2 R30.1 U7.13 | length 428.2
  Bottom Layer w10: R1.2 -711,-2712.84 -702.84,-2721 -654,-2721 -645,-2730 R30.1 -604.01,-2712.01 U7.13
  Bottom Layer w20: v2(-729,-2820) -734.24,-2820 -743.93,-2810.31 -747.69,-2810.31 -770.67,-2787.33 -770.67,-2726.67 -736.69,-2692.69 -720.69,-2692.69 R1.2
NetR2_1: R2.1 U1.6 | length 286.7
  Top Layer w10: R2.1 577.87,-3177.05 635,-3119.92 U1.6
NetR2_2: R2.2 U1.7 | length 214.9
  Top Layer w10: R2.2 544.37,-3145.55 585,-3104.92 U1.7
NetR2_3: R2.3 U1.8 | length 143
  Top Layer w10: R2.3 510.87,-3114.06 535,-3089.92 U1.8
NetR3_1: R3.1 R6.2 U5.2 | length 738.6
  Top Layer w10: v1(22.91,-3516.94) 495.94,-3516.94 v1(510,-3531)
  Bottom Layer w10: U5.2 v1(22.91,-3516.94) 87.94,-3516.94 103.01,-3532.01 R3.1 ; R6.2 457.01,-3531 v1(510,-3531)
NetR3_2: R3.2 R31.1 U5.1 | length 139.6
  Bottom Layer w10: U5.1 72.91,-3595.2 79.72,-3602.01 R31.1
NetR4_1: R4.1 U4.11 | length 123.3
  Bottom Layer w10: R4.1 196.74,-3052.01 U4.11
NetR5_2: R5.2 U4.10 | length 117.7
  Bottom Layer w10: R5.2 201.76,-3086.01 217.76,-3102.01 U4.10
NetR6_1: R6.1 U4.7 | length 622
  Bottom Layer w10: R6.1 494.99,-3602.01 537,-3560 537,-3198 570,-3165 570,-3114.09 557.91,-3102.01 U4.7
NetR7_2: R7.2 R8.2 U7.6 | length 165
  Bottom Layer w10: U7.6 R8.2 R7.2
NetR8_1: R8.1 U7.7 U7.10 | length 412.3
  Bottom Layer w10: U7.10 -501,-2862.01 -482.09,-2880.92 -482.09,-2925.91 -445.99,-2962.01 U7.7 -237.09,-2962.01 R8.1
NetR9_2: R9.2 R15.1 R33.2 R34.2 U5.7 | length 444.2
  Bottom Layer w10: R33.2 R34.2 R9.2 -372,-3381 -366,-3387 -318,-3387 -312,-3393 R15.1 -227.09,-3505.91 U5.7
NetR10_2: R10.2 R14.2 U7.5 | length 313.5
  Bottom Layer w10: U7.5 -140.35,-2862.01 -90.35,-2912.01 R14.2 R10.2@-24.28,-2912.01
NetR11_1: R11.1 R15.2 R17.1 U5.9 | length 492.6
  Bottom Layer w10: R15.2 -261.06,-3401.94 -182.94,-3401.94 -177.09,-3396.08 U5.9 ; U5.9@-174.72,-3350.79 -174.72,-3309.64 -102.09,-3237.01 R17.1 R11.1
NetR12_2: R12.2 R13.1 U5.13 | length 275.7
  Bottom Layer w10: R12.2 6.91,-3131.01 6.91,-3186.01 27.91,-3207.01 R13.1 ; U5.13 22.91,-3321.51 27.91,-3316.51 R13.1@27.91,-3252.01
NetR13_2: R13.2 R16.1 U5.14 | length 196.1
  Bottom Layer w10: U5.14 76.69,-3347.01 R16.1 142.91,-3282.01 117.6,-3256.69 107.6,-3256.69 R13.2@97.91,-3247.01
NetR19_1: R19.1 R21.2 U7.9 | length 159.4
  Bottom Layer w10: R19.1 R21.2 -637.99,-2912.01 U7.9
NetR33_1: R33.1 U9.1 | length 123.5
  Bottom Layer w10: R33.1@-494,-3423 R33.1 -451.69,-3461.31 U9.1
NetR34_1: R34.1 U9.2 | length 104.1
  Bottom Layer w10: R34.1 -432,-3421.31 U9.2
SIN: C20.1 J5.1 U8.1 U8.4 | length 420.8
  Bottom Layer w10: J5.1 182,-3730 243,-3669 U8.1 ; C20.1 264,-3603.16 U8.1 ; U8.4 338.38,-3778.81 338.38,-3752.38 330,-3744 291,-3744 264,-3717 U8.1
SPI2_CS: J3.4
SPI2_SCK: J3.2
USART2_RXD: J3.5
USART2_TXD: J3.7
VBUS: J1.2 J1.4 J1.6 J1.8 | length 150
  Bottom Layer w20: J1.2 J1.4 J1.6 J1.8
VCC_3V3_MCU: C3.2 C22.1 D1.1 D2.1 D3.1 J4.7 R18.2 R22.2 R23.2 R24.2 R25.2 U1.5 U9.8 | length 5430.1
  Top Layer w15: U1.5 685.95,-3042.84 685.95,-3085.05 702.91,-3102.01 C3.2 v3(747.91,-3157.01)
  Top Layer w20: v1(-741.09,-2237.01) -766.06,-2261.98 -766.06,-2582.98 v1(-768.09,-2585.01) -681,-2672.09 -681,-3207 -720,-3246 -720,-3402 -681,-3441 -681,-3492 v1(-564,-3609) ; v1(-33.09,-2480.01) -34.01,-2479.09 -57.22,-2479.09 -93.09,-2443.22 v1(-93.09,-2249.01) -30.09,-2186.01 v1(-30.09,-2129.01) ; v1@-33.09,-2479.09 -13.01,-2479.09 12.27,-2504.37 12.27,-2569.65 -36.64,-2618.56 -36.64,-2663.81 D1.1 D2.1 D3.1 -37.4,-3341.69 -27.24,-3351.85 53.07,-3351.85 77.91,-3327.01 77.91,-3252.01 117.91,-3212.01 612.91,-3212.01 667.91,-3157.01 v3(747.91,-3157.01)
  Bottom Layer w10: v1(-564,-3609) -564,-3633 -549,-3648 C22.1 -452.64,-3648 U9.8 ; R22.2@-92.09,-2537.01 -35.09,-2480.01 v1(-33.09,-2480.01)
  Bottom Layer w15: v3(747.91,-3157.01) 788.59,-3197.68 788.59,-3276.33 763.98,-3300.94 J4.7
  Bottom Layer w20: v1(-768.09,-2585.01) -768.09,-2538.01 R24.2 ; R25.2 -761.56,-2291.49 -761.56,-2260.73 -741.09,-2240.26 v1(-741.09,-2237.01) -737.84,-2237.01 -723.62,-2222.79 -588,-2222.79 -494.21,-2129 v1(-30.09,-2129.01) ; v1(-93.09,-2249.01) -93.09,-2296.01 R23.2 ; R18.2 -79.65,-2699.41 -53.69,-2699.41 -36.09,-2717.01 v1(-36.09,-2768.01)
VCC_5V: C4.1 C5.1 C6.1 C8.2 C9.2 C18.2 C19.2 J2.1 J2.3 J2.5 J2.7 U2.2 U3.16 U4.16 U5.4 U6.4 U7.4 U8.5 | length 5838.7
  Top Layer w20: v1(-771.09,-2672.01) -771.09,-3451.4 -772.79,-3453.1 -772.79,-3476.03 -771.09,-3477.73 -771.09,-3578.01 -697.09,-3652.01 v1(-77.09,-3652.01) C18.2 ; C19.2 v1(-264.12,-2812.01) -262.56,-2810.45 -262.56,-2419.56 v1(-261,-2418) ; C8.2 -301.09,-2418 v1(-261,-2418) ; v3(-36.09,-2033.01) -41.5,-2033.01 -261,-2252.51 v1(-261,-2418)
  Bottom Layer w10: v1(-77.09,-3652.01) -75.36,-3652.01 -49.37,-3678 15,-3678 51,-3714 51,-3771 63,-3783 260.24,-3783 U8.5
  Bottom Layer w20: v1(-771.09,-2672.01) -726.09,-2627.01 -457.09,-2627.01 -399,-2685.09 -399,-2780.09 -367.09,-2812.01 U7.4 v1(-264.12,-2812.01) 62.17,-2812.01 ; U6.4 -315.37,-2417.5 -261.5,-2417.5 v1(-261,-2418) ; v1(-77.09,-3652.01) U5.4 ; U2.2 -37.09,-2032.01 v3(-36.09,-2033.01) 56.91,-2033.01 137.91,-1952.01 C4.1 273.03,-1891.89 477.91,-1687.01 477.91,-1587.01 437.91,-1547.01 437.91,-1522.08 429.33,-1513.5 J2.7 J2.5 J2.3 J2.1 ; 67.91,-2811.38 C6.1@197.28,-2811.38 ; C5.1@107.91,-2831 C5.1@107.91,-2813.76 ; C6.1@197.91,-2802.01 U4.16 327.91,-2802.01 342.91,-2787.01 C9.2 342.91,-2598.68 344.59,-2597.01 U3.16
VCC_-5V: C2.1 C10.2 C11.2 U2.1 U4.8 U4.12 U5.11 U6.11 U7.11 U8.2 | length 4447.8
  Top Layer w20: v2(-486,-2811) -487.09,-2809.91 v1(-487.09,-2417.01) -17.09,-1947.01 v3(67.91,-1947.01) 123,-2002.09 123,-2846.92 110.41,-2859.51 110.41,-2929.51 v1(132.91,-2952.01) ; C10.2 -72.13,-3371.96 -72.13,-3414.7 v1(-69.84,-3417) ; v4(405,-3714) 549,-3570 549,-3477 v4(453,-3381)
  Bottom Layer w20: U7.11 -487.01,-2812.01 v2(-486,-2811) ; U6.11 v1(-487.09,-2417.01) ; U5.11 -77.09,-3408.74 -69.84,-3415.99 v1(-69.84,-3417) ; v1@-63,-3422.83 -63,-3426 -60,-3429 60,-3429 93,-3462 372,-3462 v4(453,-3381) 507.91,-3326.09 507.91,-3155.14 509.59,-3153.46 509.59,-3152.01 472.91,-3152.01 322.91,-3002.01 U4.12 274.11,-3001.31 247.22,-3001.31 C11.2 v1(132.91,-2952.01) ; U2.1 1.14,-1931.18 1.14,-1903.61 12.86,-1891.89 C2.1 v3(67.91,-1947.01) ; U8.2 301.4,-3697.4 318,-3714 v4(405,-3714)
Vref: R7.1 U3.3 | length 746.9
  Top Layer w10: v1(-152.09,-3027.01) -72,-2946.92 -72,-2575.92 v1(-36.09,-2540.01)
  Bottom Layer w10: v1(-152.09,-3027.01) R7.1 ; v1(-36.09,-2540.01) -13.08,-2517 42,-2517 61.99,-2497.01 U3.3
Vref_1V43: U3.1 U6.8 U6.9 | length 741.5
  Bottom Layer w15: U6.9 U6.8 -427.09,-2567.01 -380.09,-2614.01 5.91,-2614.01 22.91,-2597.01 U3.1
Vref_1V98: U3.5 U6.13 U6.14 | length 917.9
  Bottom Layer w12: U6.14 -507.09,-2267.01 -394.08,-2154 -70.09,-2154 66,-2290.09 66,-2384.66 75.88,-2394.54 110.44,-2394.54 U3.5
  Bottom Layer w15: U6.13 U6.14
Vref_2V53: U3.15 U7.1 U7.2 | length 765
  Bottom Layer w15: U7.2 U7.1 -291.5,-2662.01 -287.18,-2657.7 -287.18,-2655.79 -278.4,-2647.01 142.91,-2647.01 242.91,-2547.01 U3.15
Vref_V3: U3.4 U6.1 U6.2 | length 702.6
  Bottom Layer w15: U6.2 U6.1 -312.64,-2263.78 -263.86,-2263.78 -178.08,-2178 -81,-2178 0.18,-2259.18 0.18,-2388.18 59.01,-2447.01 U3.4
Vref_V89: U3.2 U6.6 U6.7 | length 499.5
  Bottom Layer w15: U6.6 U6.7 -287.94,-2567.01 -272.94,-2582.01 -22.09,-2582.01 12.91,-2547.01 U3.2
VSS: J1.1 J1.3 J1.5 J1.7 | length 150
  Bottom Layer w20: J1.1 J1.3 J1.5 J1.7
pads on no net: R2.4 R2.5 U3.12 U3.14 U4.1 U4.2 U4.3 U4.4 U4.5 U4.6 U4.13 U4.14 U4.15

## Polygon pours and split planes (outlines as drawn)
GND on Top Layer "GND_L01_P003" (solid, remove dead copper, pour order 3): 482.91,-3807.01 482.91,-3927.01 802.91,-3927.01 802.91,-2697.01 392.91,-2697.01 372.91,-2677.01 372.91,-2047.01 392.91,-2027.01 602.91,-2027.01 602.91,-1427.01 -597.09,-1427.01 -597.09,-2057.01 -607.09,-2067.01 -787.09,-2067.01 -797.09,-2077.01 -797.09,-3917.01 -787.09,-3927.01 -487.09,-3927.01 -477.09,-3917.01 -477.09,-3807.01
GND on Bottom Layer "GND_L02_P001" (solid, remove dead copper, pour order 1): 482.91,-3807.01 482.91,-3927.01 802.91,-3927.01 802.91,-2697.01 392.91,-2697.01 372.91,-2677.01 372.91,-2047.01 392.91,-2027.01 602.91,-2027.01 602.91,-1427.01 -597.09,-1427.01 -597.09,-2057.01 -607.09,-2067.01 -787.09,-2067.01 -797.09,-2077.01 -797.09,-3917.01 -787.09,-3927.01 -487.09,-3927.01 -477.09,-3917.01 -477.09,-3807.01

## Keep-outs
Keep-Out Layer:
  circle w10: c-669.29,-3779.53 r35.43
  circle w10: c669.29,-3779.53 r35.43
  circle w10: c-669.29,-2165.35 r35.43
  circle w10: c511.81,-1535.43 r35.43
  circle w10: c-511.81,-1535.43 r35.43
  circle w10: c669.29,-2834.65 r35.43
  lines w10: -807.09,-3937.01 -472.44,-3937.01 -472.44,-3818.9 472.44,-3818.9 472.44,-3937.01 807.09,-3937.01 807.09,-2677.17 393.7,-2677.17 393.7,-2047.24 610.24,-2047.24 610.24,-1417.32 -610.24,-1417.32 -610.24,-2047.24 -807.09,-2047.24 -807.09,-3937.01

## Other copper
Bottom Layer:
  pour cut-out: 633.86,-2834.65 ccw(c669.29,-2834.65) 669.29,-2870.08 ccw(c669.29,-2834.65) 704.72,-2834.65 ccw(c669.29,-2834.65) 669.29,-2799.21 ccw(c669.29,-2834.65)
  pour cut-out: -68,-2443.01 -239.09,-2443.01 -239.09,-2566.01 -68,-2566.01
  pour cut-out: 40.64,-3775.29 40.64,-3808.64 45,-3813
  pour cut-out: -518,-3607.65 -528.35,-3618 -609,-3618
  pour cut-out: -6.4,-3066.32 27.32,-3066.32 36,-3075
  pour cut-out: 72.23,-3267.69 53.6,-3267.69 60.29,-3261 78,-3261
  pour cut-out: 123.6,-3216.32 126,-3213.92 126,-3207
  pour cut-out: -68,-2270.01 -239.09,-2270.01 -239.09,-2393.01 -68,-2393.01
  pour cut-out: -613,-2440.01 -784.09,-2440.01 -784.09,-2563.01 -613,-2563.01
  pour cut-out: -613,-2270.01 -784.09,-2270.01 -784.09,-2393.01 -613,-2393.01
  pour cut-out: -357.78,-2262 -336.78,-2241 -294.78,-2241 -273.78,-2262 -273.78,-2571 -303.78,-2601 -327.78,-2601 -357.78,-2571
  pour cut-out: -594,-2262 -588,-2256 -516,-2256 -510,-2262 -510,-2571 -522,-2583 -582,-2583 -594,-2571
  pour cut-out: 391.3,-2601 379.3,-2613 319.3,-2613 307.3,-2601 307.3,-2243.26 319.3,-2231.26 379.3,-2231.26 391.3,-2243.26
  pour cut-out: 155.07,-2601 143.07,-2613 83.07,-2613 71.07,-2601 71.07,-2243.26 83.07,-2231.26 143.07,-2231.26 155.07,-2243.26
  pour cut-out: -63,-2664.97 -234.09,-2664.97 -234.09,-2796 -63,-2796
  pour cut-out: -0.09,-2823 -234.09,-2823 -234.09,-3008.01 -0.09,-3008.01
  pour cut-out: -595.47,-2656.75 -583.47,-2644.75 -523.47,-2644.75 -464.04,-2704.18 -464.04,-2977.75 -583.47,-2977.75 -595.47,-2965.75
  pour cut-out: -411,-2682 -357,-2628 -304,-2628 -275.25,-2656.75 -275.25,-2965.75 -287.25,-2977.75 -347.25,-2977.75 -411,-2914
  pour cut-out: 316.96,-3156 304.96,-3168 244.96,-3168 232.96,-3156 232.96,-2798.26 244.96,-2786.26 304.96,-2786.26 316.96,-2798.26
  pour cut-out: 553.19,-3156 541.19,-3168 481.19,-3168 469.19,-3156 469.19,-2798.26 481.19,-2786.26 541.19,-2786.26 553.19,-2798.26
  pour cut-out: -191.17,-3189.01 -20.09,-3189.01 -20.09,-3066.01 -191.17,-3066.01
  pour cut-out: 66.68,-2996.92 66.68,-3168.01 189.68,-3168.01 189.68,-2996.92
  pour cut-out: -285,-3324 -519,-3324 -519,-3447 -285,-3447
  pour cut-out: -232.34,-3392.95 -244.34,-3380.95 -244.34,-3320.95 -232.34,-3308.95 76.66,-3308.95 88.66,-3320.95 88.66,-3380.95 76.66,-3392.95
  pour cut-out: -232.34,-3629.17 -244.34,-3617.17 -244.34,-3557.17 -232.34,-3545.17 76.66,-3545.17 88.66,-3557.17 88.66,-3617.17 76.66,-3629.17
  pour cut-out: 108,-3501 486,-3501 486,-3630 483,-3633 108,-3633

## Silkscreen, mask and mechanical layers (free items; w line width, h text height)
Top Overlay:
  circle w10: c-669.29,-3779.53 r78.74
  circle w10: c669.29,-3779.53 r78.74
  circle w10: c669.29,-2834.65 r78.74
  circle w10: c-669.29,-2165.35 r78.74
  circle w10: c-511.81,-1535.43 r78.74
  circle w10: c511.81,-1535.43 r78.74
  lines w5.91: -190,-1360.24 190,-1360.24 -190,-1360.24
  text "DS133-1.0-B" at 480,-3920 h40
Bottom Overlay:
  circle w10: c-669.29,-3779.53 r98.43
  circle w10: c669.29,-3779.53 r98.43
  circle w10: c669.29,-2834.65 r98.43
  circle w10: c-669.29,-2165.35 r98.43
  circle w10: c-511.81,-1535.43 r78.74
  circle w10: c511.81,-1535.43 r78.74
Mechanical 1:
  circle w10: c669.29,-2834.65 r35.43
  circle w10: c-511.81,-1535.43 r35.43
  circle w10: c511.81,-1535.43 r35.43
  circle w10: c-669.29,-2165.35 r35.43
  circle w10: c669.29,-3779.53 r35.43
  circle w10: c-669.29,-3779.53 r35.43
  lines w10: -807.09,-3937.01 -472.44,-3937.01 -472.44,-3818.9 472.44,-3818.9 472.44,-3937.01 807.09,-3937.01 807.09,-2677.17 393.7,-2677.17 393.7,-2047.24 610.24,-2047.24 610.24,-1417.32 -610.24,-1417.32 -610.24,-2047.24 -807.09,-2047.24 -807.09,-3937.01
Mechanical 15:
  circle w10: c0,-3294.49 r23.62
  circle w10: c0,-2979.53 r23.62
  circle w10: c0,-2664.57 r23.62
  circle w10: c0,-2341.73 r59.06
  lines w5.91: -176.57,-1417.32 -176.57,-1748.43 176.57,-1748.43 176.57,-1417.32
  lines w20: -629.92,-2007.87 629.92,-2007.87

## Text inside footprints (layer, text, board x,y; h text height)
C5: Bottom Overlay "+" at 44.92,-2890.06 h39.37 r270